# EAGLE board aps (EAGLE 4.13), part 1 of 2
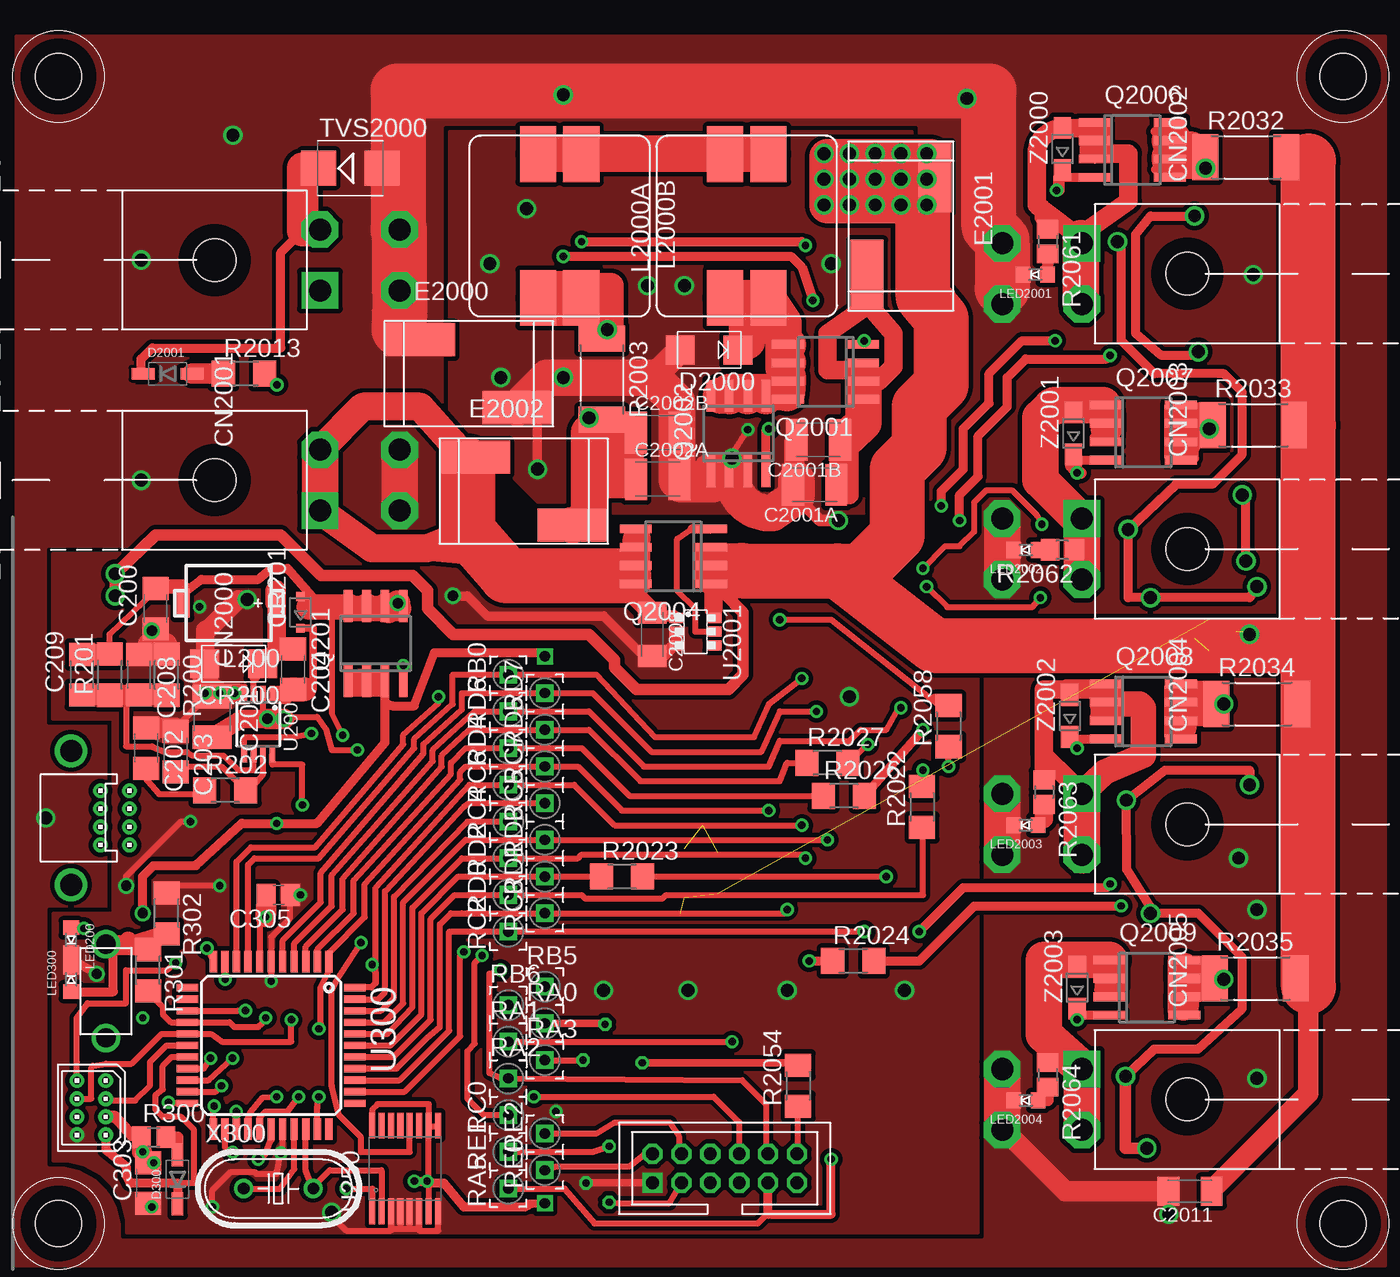
[diagram p0: board, top side]
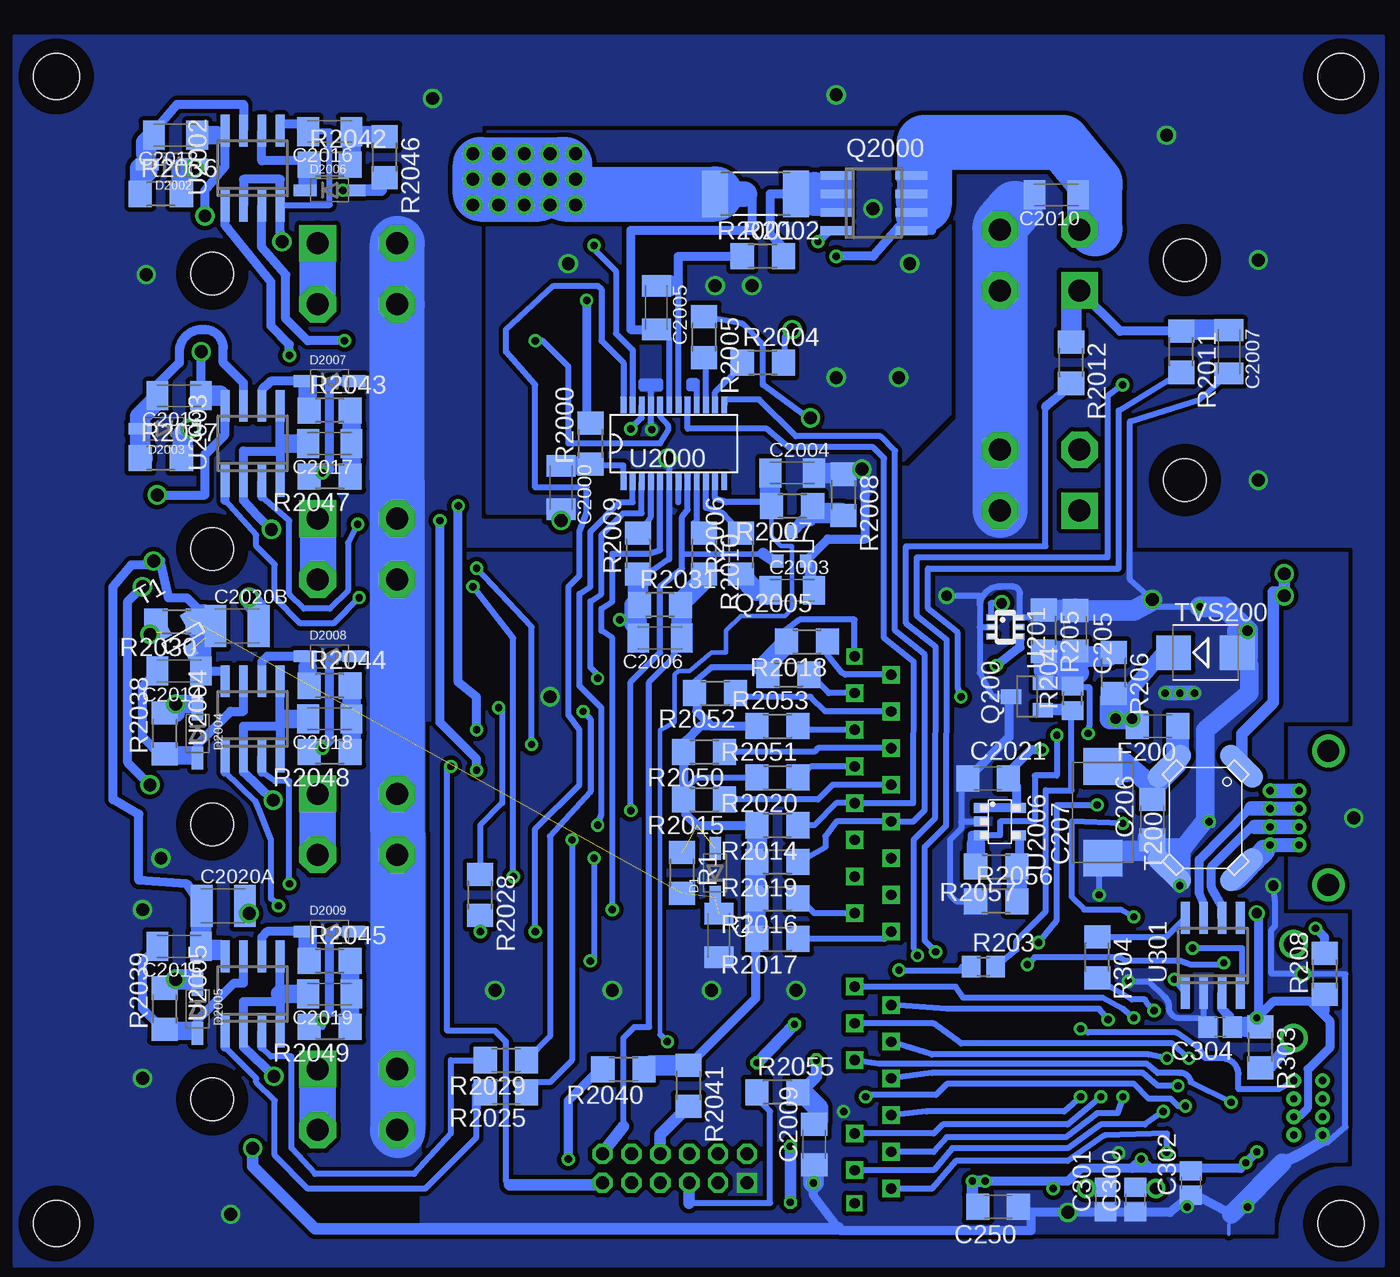
[diagram p1: board, bottom side, seen from below]

No outline drawn. Coordinates in mm, seen from the top.
Copper layers (1*16): Top 0.035mm / dielectric 1.5mm / Bottom 0.035mm
Design rules "LV2": minimum track width 8mil, minimum drill 20mil, track to track 8mil, track to pad 8mil, pad to pad 8mil, via to via 8mil, smd to smd 0mil, copper to edge 40mil, drill to drill 8mil, minimum pad ring 10mil, minimum via ring 8mil, stop-mask expansion 4mil, vias tented up to drill 0mil, thermal gap 10mil
Holes 3.17 mm at 3.17,3.17 92.08,3.17 3.17,82.55 92.08,82.55

## Footprints (pad centres in the part's own frame; a part is rotated, then mirrored left to right if it is on the bottom)
C1206K = smd 1.5 x 2: 1 -1.5,0; 2 1.5,0
C1206 = smd 1.6 x 1.8: 1 -1.4,0; 2 1.4,0
C1210 = smd 1.6 x 2.7: 1 -1.4,0; 2 1.4,0
D/7343-31R = smd 2.55 x 2.7: + 3.175,0; - -3.175,0
C0805 = smd 1.3 x 1.5: 1 -0.85,0; 2 0.85,0
C1210K = smd 1.5 x 2.9: 1 -1.5,0; 2 1.5,0
JST-08R-JED = drill 0.508 pad 1.016 round: 1 1.875,1; 2 1.875,-1; 3 0.625,1; 4 0.625,-1; 5 -0.625,1; 6 -0.625,-1; 7 -1.875,1; 8 -1.875,-1
CAN_NODE = drill 0.508 pad 1.016 round: B+@1 2,1.875; B+@2 0,1.875; B-@7 2,-1.875; B-@8 0,-1.875; CANH@3 2,0.625; CANH@4 0,0.625; CANL@5 2,-0.625; CANL@6 0,-0.625 | drill 1.511 round: CHASSIS@1 -2.032,4.636; CHASSIS@2 -2.032,-4.636
CONN_MINIFIT_HEADER_RT = drill 1.524 pad 2.54 square: 1 2.108,7.29 | drill 1.524 pad 2.54 octagon: 2 -2.108,7.29; 3 2.108,12.802; 4 -2.108,12.802 | hole 2.946: 0,0
2MM-2X6-SHROUDED-HEADER = drill 0.889 pad 1.321 square: 1 -5,-1 | drill 0.889 pad 1.321 octagon: 2 -5,1; 3 -3,-1; 4 -3,1; 5 -1,-1; 6 -1,1; 7 1,-1; 8 1,1; 9 3,-1; 10 3,1; 11 5,1; 12 5,-1
NMINIP2-J1 = smd 2 x 2: A 2,0; C -2,0
SOD323-R = smd 0.6 x 0.6: A 1.1,0; C -1.1,0
SOD-123-DIODE = smd 1.6 x 0.8: 1(CATHODE) -1.7,0; 2(ANODE) 1.7,0
SMB_SHEILD_BEADS = smd 4.826 x 2.286: P$1 -3.365,2.349; P$2 3.365,-2.349
1206 = smd 1.6 x 1.8: 1 -1.4,0; 2 1.4,0
MP2A = smd 1.05 x 2: P1 -3.225,0; P2 3.225,0
INDUCTOR_DRQ125 = smd 3.85 x 2.5: P$1 -4.975,1.5; P$2 -4.975,-1.5; P$3 4.975,-1.5; P$4 4.975,1.5
0603-DIODE = smd 1 x 1.1: A -0.85,0; K 0.85,0
SOT23 = smd 1 x 1.4: 1 -0.95,-1.1; 2 0.95,-1.1; 3 0,1.1
SO8@1 = smd 0.6 x 2.2: 1 -1.905,-2.6; 2 -0.635,-2.6; 3 0.635,-2.6; 4 1.905,-2.6; 5 1.905,2.6; 6 0.635,2.6; 7 -0.635,2.6; 8 -1.905,2.6
SO8 = smd 0.6 x 2.2: 1 -1.905,-2.6; 2 -0.635,-2.6; 3 0.635,-2.6; 4 1.905,-2.6; 5 1.905,2.6; 6 0.635,2.6; 7 -0.635,2.6; 8 -1.905,2.6
SOT-23 = smd 0.787 x 0.889: 1 0.025,-1.016; 2 -0.94,1.016; 3 0.991,1.016
R1206 = smd 1.6 x 1.803: 1 -1.422,0; 2 1.422,0
R0805 = smd 1.3 x 1.5: 1 -0.85,0; 2 0.85,0
R2512 = smd 1.8 x 3.2: 1 -2.8,0; 2 2.8,0
PAD_SQUARE_APC-FREE_0.1/028 = drill 0.711 pad 1.168 square: PAD 0,0
SW_6X3.5MM = drill 1.321 round: 1 -3.25,0; 2 3.25,0
CMS1 = smd 3.63 x 1.5 rotated 45: 1 3.58,-2.5; 3 -3.58,2.5 | smd 3.63 x 1.5 rotated 135: 2 3.58,2.5; 4 -3.58,-2.5
SMB = smd 2.4 x 2.4: A 2.2,0; C -2.2,0
MSOP8 = smd 0.4 x 1.2: 1 -0.975,-2.05; 2 -0.325,-2.05; 3 0.325,-2.05; 4 0.975,-2.05; 5 0.975,2.05; 6 0.325,2.05; 7 -0.325,2.05; 8 -0.975,2.05
SC70-6 = smd 0.4 x 0.75: 1 -0.65,-0.95; 2 0,-0.95; 3 0.65,-0.95; 4 0.65,0.95; 5 0,0.95; 6 -0.65,0.95
TSSOP-16 = smd 0.42 x 1.78: 1 -2.275,-2.97; 2 -1.625,-2.97; 3 -0.975,-2.97; 4 -0.325,-2.97; 5 0.325,-2.97; 6 0.975,-2.97; 7 1.625,-2.97; 8 2.275,-2.97; 9 2.275,2.97; 10 1.625,2.97; 11 0.975,2.97; 12 0.325,2.97; 13 -0.325,2.97; 14 -0.975,2.97; 15 -1.625,2.97; 16 -2.275,2.97
TQFP44 = smd 1.5 x 0.5: 1 -5.8,4; 2 -5.8,3.2; 3 -5.8,2.4; 4 -5.8,1.6; 5 -5.8,0.8; 6 -5.8,0; 7 -5.8,-0.8; 8 -5.8,-1.6; 9 -5.8,-2.4; 10 -5.8,-3.2; 11 -5.8,-4; 23 5.8,-4; 24 5.8,-3.2; 25 5.8,-2.4; 26 5.8,-1.6; 27 5.8,-0.8; 28 5.8,0; 29 5.8,0.8; 30 5.8,1.6; 31 5.8,2.4; 32 5.8,3.2; 33 5.8,4 | smd 0.5 x 1.5: 12 -4,-5.8; 13 -3.2,-5.8; 14 -2.4,-5.8; 15 -1.6,-5.8; 16 -0.8,-5.8; 17 0,-5.8; 18 0.8,-5.8; 19 1.6,-5.8; 20 2.4,-5.8; 21 3.2,-5.8; 22 4,-5.8; 34 4,5.8; 35 3.2,5.8; 36 2.4,5.8; 37 1.6,5.8; 38 0.8,5.8; 39 0,5.8; 40 -0.8,5.8; 41 -1.6,5.8; 42 -2.4,5.8; 43 -3.2,5.8; 44 -4,5.8
SSOP24_NARROW = smd 0.406 x 1.143: 1 -3.556,-2.667; 2 -2.921,-2.667; 3 -2.286,-2.667; 4 -1.651,-2.667; 5 -1.016,-2.667; 6 -0.381,-2.667; 7 0.254,-2.667; 8 0.889,-2.667; 9 1.524,-2.667; 10 2.159,-2.667; 11 2.794,-2.667; 12 3.429,-2.667; 13 3.429,2.667; 14 2.794,2.667; 15 2.159,2.667; 16 1.524,2.667; 17 0.889,2.667; 18 0.254,2.667; 19 -0.381,2.667; 20 -1.016,2.667; 21 -1.651,2.667; 22 -2.286,2.667; 23 -2.921,2.667; 24 -3.556,2.667
SOT23-6 = smd 0.7 x 1: 1 -0.95,-1.3; 2 0,-1.3; 3 0.95,-1.3; 4 0.95,1.3; 5 0,1.3; 6 -0.95,1.3
SOT23-5 = smd 0.7 x 1: 1 -0.95,-1.3; 2 0,-1.3; 3 0.95,-1.3; 4 0.95,1.3; 5 -0.95,1.3
HC49U70 = drill 0.813 round: 1 -2.413,0; 2 2.413,0
SOD323-W = smd 1.5 x 1.2: A 1.45,0; C -1.45,0

## Placement (x,y rotation side)
C1  0.1  [C1206K]  46.23,23.11 270 bottom
C200  22  [C1206]  9.88,45.72 90 top
C201  10  [C1210]  13.82,38.23 270 top
C202  470pF  [C1206]  9.25,36.07 270 top
C203  np  [C1206]  11.28,35.81 270 top
C204  0.1  [C1206]  19.41,41.53 270 top
C205  .1  [C1206]  21.56,44.2 270 bottom
C206  .33  [C1206]  16.23,31.11 90 bottom
C207  22  [D/7343-31R]  19.66,31.62 90 bottom
C208  10pF  [C1206]  8.74,41.15 270 top
C209  120pF  [C1206]  4.8,41.15 90 top
C250  .1  [C1206]  26.9,4.32 180 bottom
C300  27pF  [C0805]  17.4,4.83 90 bottom
C301  27pF  [C0805]  19.46,4.83 90 bottom
C302  .1  [C0805]  13.56,5.97 90 bottom
C303  .1  [C1206]  9.37,5.97 90 top
C304  .1  [C0805]  11.53,16.76 180 bottom
C305  .1  [C0805]  18.39,25.91 180 top
C2000  100nF  [C1206K]  57.15,54.1 270 bottom
C2001A  10uF / 50V  [C1210K]  55.5,54.29 180 top
C2001B  10uF / 50V  [C1210K]  55.75,57.4 180 top
C2002A  10uF  [C1210K]  44.64,54.67 0 top
C2002B  10uF  [C1210K]  44.64,57.91 0 top
C2003  120nF  [C1206K]  41.15,46.99 0 bottom
C2004  4.7nF  [C1206K]  41.15,55.12 0 bottom
C2005  15nF  [C1206K]  50.55,66.55 270 bottom
C2006  1uF  [C1206K]  50.29,43.69 180 bottom
C2007  1uF  [C1206K]  10.92,63.5 270 bottom
C2008  100nF  [C1206K]  44.26,43.94 270 top
C2009  1uF  [C1206]  39.62,8.64 90 bottom
C2010  100nF  [C1206K]  22.86,74.36 180 bottom
C2011  100nF/50V  [C1206K]  81.47,5.4 180 top
C2012  ??  [C1206K]  83.82,78.49 180 bottom
C2013  ??  [C1206K]  83.57,60.45 180 bottom
C2014  ??  [C1206K]  83.57,41.4 180 bottom
C2015  ??  [C1206K]  83.57,22.35 180 bottom
C2016  ??  [C1206K]  73.15,78.74 180 bottom
C2017  ??  [C1206K]  73.15,57.15 180 bottom
C2018  ??  [C1206K]  73.15,38.1 180 bottom
C2019  ??  [C1206K]  73.15,19.05 180 bottom
C2020A  10uF  [C1210K]  80.52,25.15 0 bottom
C2020B  10uF  [C1210K]  79.57,44.51 0 bottom
C2021  100nF  [C1206]  27.6,33.97 0 bottom
CF300  ICD  [JST-08R-JED]  5.44,11.18 270 top
CM200  CAN  [CAN_NODE]  6.07,31.24 0 top
CN2000  BATTERY  [CONN_MINIFIT_HEADER_RT]  13.97,54.61 270 top
CN2001  [CONN_MINIFIT_HEADER_RT]  13.97,69.85 270 top
CN2002  [CONN_MINIFIT_HEADER_RT]  81.28,68.9 90 top
CN2003  [CONN_MINIFIT_HEADER_RT]  81.28,49.85 90 top
CN2004  [CONN_MINIFIT_HEADER_RT]  81.28,30.8 90 top
CN2005  [CONN_MINIFIT_HEADER_RT]  81.28,11.75 90 top
CN2006  [2MM-2X6-SHROUDED-HEADER]  49.28,6.99 0 top
CR200  MA2Q705  [NMINIP2-J1]  15.29,41.91 180 top
CR201  BAV16W  [SOD323-R]  19.91,45.47 90 top
D1  [SOD-123-DIODE]  46.48,27.43 90 bottom
D300  1N4148  [SOD-123-DIODE]  11.4,6.22 90 top
D2000  MA2Q705  [NMINIP2-J1]  48.2,63.63 180 top
D2001  [SOD-123-DIODE]  10.73,61.98 0 top
D2002  [SOD-123-DIODE]  84.07,76.45 180 bottom
D2003  [SOD-123-DIODE]  84.58,58.17 180 bottom
D2004  [SOD-123-DIODE]  82.3,37.08 270 bottom
D2005  [SOD-123-DIODE]  82.3,18.03 270 bottom
D2006  [SOD-123-DIODE]  73.15,74.68 0 bottom
D2007  [SOD-123-DIODE]  73.15,61.47 0 bottom
D2008  [SOD-123-DIODE]  73.15,42.42 0 bottom
D2009  [SOD-123-DIODE]  73.15,23.37 0 bottom
E2000  [SMB_SHEILD_BEADS]  31.56,61.98 0 top
E2001  [SMB_SHEILD_BEADS]  61.47,72.2 270 top
E2002  [SMB_SHEILD_BEADS]  35.37,53.85 0 top
F200  1A  [1206]  15.85,37.59 180 bottom
L200  47uH  [MP2A]  14.96,46.1 180 top
L2000A  6.8uH  [INDUCTOR_DRQ125]  50.8,72.2 270 top
L2000B  6.8uH  [INDUCTOR_DRQ125]  37.85,72.2 90 top
LED200  LED-GRN-  [0603-DIODE]  4.04,22.78 270 top
LED300  LED-RED-0603  [0603-DIODE]  4.04,20.07 90 top
LED2001  LED-RED-0603  [0603-DIODE]  70.76,68.83 180 top
LED2002  LED-RED-0603  [0603-DIODE]  70.1,49.78 180 top
LED2003  LED-RED-0603  [0603-DIODE]  70.1,30.73 180 top
LED2004  LED-RED-0603  [0603-DIODE]  70.1,11.68 180 top
Q200  '3906  [SOT23]  24.89,39.64 90 bottom
Q201  TPC8009  [SO8@1]  25.12,43.31 0 top
Q2000  [SO8]  35.5,73.79 270 bottom
Q2001  [SO8]  56.26,62.1 90 top
Q2002  [SO8]  50.23,57.85 0 top
Q2004  [SO8]  45.72,49.34 90 top
Q2005  [SOT-23]  41.15,50.04 180 bottom
Q2006  [SO8]  77.47,77.47 270 top
Q2007  [SO8]  78.23,57.91 270 top
Q2008  [SO8]  78.23,38.61 270 top
Q2009  [SO8]  78.49,19.49 270 top
R1  ??  [R1206]  48.77,27.43 270 bottom
R200  10k  [R1206]  10.64,41.15 270 top
R201  29.4k  [R1206]  6.71,41.15 90 top
R202  10k  [R1206]  14.71,33.15 0 top
R203  10k  [R0805]  27.91,20.95 0 bottom
R204  100k  [R0805]  21.74,39.51 90 bottom
R205  10.0k  [R1206]  23.72,44.2 270 bottom
R206  60.4k  [R1206]  18.9,41.27 270 bottom
R208  1.8k  [R1206]  4.29,20.45 90 bottom
R300  1k  [R0805]  9.75,9.14 0 top
R301  750  [R1206]  9.37,20.7 270 top
R302  47.5k  [R1206]  10.64,24.64 270 top
R303  1.8k  [R1206]  8.74,15.37 270 bottom
R304  0  [R1206]  20.04,21.59 270 bottom
R2000  10  [R1206]  55.12,57.15 90 bottom
R2001  0.2 / 1W  [R2512]  43.69,74.42 180 bottom
R2002  5k  [R1206]  43.18,70.1 0 bottom
R2003  0.02 / 1W  [R2512]  40.77,61.59 270 top
R2004  2.94k  [R1206]  43.18,62.74 0 bottom
R2005  3.01k  [R1206]  47.24,64.52 270 bottom
R2006  6k  [R1206]  44.7,49.53 90 bottom
R2007  30.1k  [R1206]  41.15,52.83 180 bottom
R2008  51.1k  [R1206]  37.59,53.59 270 bottom
R2009  453k  [R1206]  51.82,49.53 90 bottom
R2010  301.k  [R1206]  47.24,49.53 270 bottom
R2011  10k  [R1206]  14.22,63.5 270 bottom
R2012  10k  [R1206]  21.84,62.74 270 bottom
R2013  220  [R1206]  16,61.98 0 top
R2014  47k  [R1206]  42.16,30.73 180 bottom
R2015  47k  [R1206]  47.24,32.51 180 bottom
R2016  47k  [R1206]  42.16,25.65 180 bottom
R2017  47k  [R1206]  42.16,22.86 180 bottom
R2018  47k  [R1206]  40.13,43.43 180 bottom
R2019  47k  [R1206]  42.16,28.19 180 bottom
R2020  47k  [R1206]  42.16,34.04 180 bottom
R2022  10K  [R1206]  62.93,32 90 top
R2023  10K  [R1206]  42.16,27.18 0 top
R2024  10K  [R1206]  58.17,21.34 0 top
R2025  10K  [R1206]  60.96,12.26 180 bottom
R2026  10K  [R1206]  57.53,32.77 0 top
R2027  10K  [R1206]  56.39,35.05 0 top
R2028  10K  [R1206]  62.74,25.91 270 bottom
R2029  10K  [R1206]  60.96,14.48 180 bottom
R2030  6R2  [R1206]  83.76,44.83 180 bottom
R2031  np  [R1206]  50.29,45.97 0 bottom
R2032  ?? / 1W  [R2512]  85.34,76.96 0 top
R2033  ?? / 1W  [R2512]  85.85,58.42 0 top
R2034  ?? / 1W  [R2512]  86.11,39.12 0 top
R2035  ?? / 1W  [R2512]  85.98,20.13 0 top
R2036  ??  [R1206]  84.84,74.42 0 bottom
R2037  ??  [R1206]  84.84,56.13 0 bottom
R2038  ??  [R1206]  84.58,37.08 90 bottom
R2039  ??  [R1206]  84.58,18.03 90 bottom
R2040  47k  [R1206]  52.83,13.84 180 bottom
R2041  47k  [R1206]  48.32,12.7 270 bottom
R2042  100k  [R1206]  73.15,76.45 0 bottom
R2043  100k  [R1206]  73.15,59.44 0 bottom
R2044  100k  [R1206]  73.15,40.39 0 bottom
R2045  100k  [R1206]  73.15,21.34 0 bottom
R2046  100k  [R1206]  69.34,76.96 270 bottom
R2047  100k  [R1206]  73.15,54.86 180 bottom
R2048  100k  [R1206]  73.15,35.81 180 bottom
R2049  100k  [R1206]  73.15,16.76 180 bottom
R2050  120k  [R1206]  47.24,35.81 180 bottom
R2051  120k  [R1206]  42.16,37.59 180 bottom
R2052  120k  [R1206]  46.48,39.88 180 bottom
R2053  120k  [R1206]  41.4,41.15 180 bottom
R2054  30.1k  [R1206]  54.36,12.7 90 top
R2055  4.7k  [R1206]  42.16,12.26 0 bottom
R2056  249k  [R1206]  27.03,25.46 0 bottom
R2057  681k  [R1206]  27.03,27.88 180 bottom
R2058  np  [R1206]  64.77,37.59 90 top
R2061  5k  [R0805]  71.63,71.12 270 top
R2062  5k  [R0805]  72.64,49.78 180 top
R2063  5k  [R0805]  71.37,33.02 270 top
R2064  5k  [R0805]  71.63,13.46 270 top
RA0  t19  [PAD_SQUARE_APC-FREE_0.1/028]  36.83,17.02 0 top
RA1  t20  [PAD_SQUARE_APC-FREE_0.1/028]  34.29,15.75 0 top
RA2  t21  [PAD_SQUARE_APC-FREE_0.1/028]  34.29,13.21 0 top
RA3  t22  [PAD_SQUARE_APC-FREE_0.1/028]  36.83,14.48 0 top
RA5  t24  [PAD_SQUARE_APC-FREE_0.1/028]  34.29,5.59 90 top
RB0  t8  [PAD_SQUARE_APC-FREE_0.1/028]  34.29,41.15 90 top
RB5  t15  [PAD_SQUARE_APC-FREE_0.1/028]  36.83,19.56 0 top
RB6  t16  [PAD_SQUARE_APC-FREE_0.1/028]  34.29,18.29 0 top
RC0  t32  [PAD_SQUARE_APC-FREE_0.1/028]  34.29,10.67 90 top
RC2  t36  [PAD_SQUARE_APC-FREE_0.1/028]  34.29,23.37 90 top
RC3  t37  [PAD_SQUARE_APC-FREE_0.1/028]  36.83,24.64 90 top
RC4  t42  [PAD_SQUARE_APC-FREE_0.1/028]  34.29,30.99 90 top
RC5  t43  [PAD_SQUARE_APC-FREE_0.1/028]  36.83,32.26 90 top
RC6  t44  [PAD_SQUARE_APC-FREE_0.1/028]  34.29,33.53 90 top
RC7  t1  [PAD_SQUARE_APC-FREE_0.1/028]  36.83,34.8 90 top
RD0  t38  [PAD_SQUARE_APC-FREE_0.1/028]  34.29,25.91 90 top
RD1  t39  [PAD_SQUARE_APC-FREE_0.1/028]  36.83,27.18 90 top
RD2  t40  [PAD_SQUARE_APC-FREE_0.1/028]  34.29,28.45 90 top
RD3  t41  [PAD_SQUARE_APC-FREE_0.1/028]  36.83,29.72 90 top
RD4  t2  [PAD_SQUARE_APC-FREE_0.1/028]  34.29,36.07 90 top
RD5  t3  [PAD_SQUARE_APC-FREE_0.1/028]  36.83,37.34 90 top
RD6  t4  [PAD_SQUARE_APC-FREE_0.1/028]  34.29,38.61 90 top
RD7  t5  [PAD_SQUARE_APC-FREE_0.1/028]  36.83,39.88 90 top
RE0  t25  [PAD_SQUARE_APC-FREE_0.1/028]  36.83,6.86 90 top
RE1  t26  [PAD_SQUARE_APC-FREE_0.1/028]  34.29,8.13 90 top
RE2  t27  [PAD_SQUARE_APC-FREE_0.1/028]  36.83,9.4 90 top
SW300  SW_MOMENTARY-6X3.5MM  [SW_6X3.5MM]  6.45,19.25 90 top
T1  BSS84ZX  [SOT-23]  83.31,43.69 30 bottom
T200  CMS1  [CMS1]  12.55,31.24 90 bottom
TVS200  SMBJ18A  [SMB]  12.55,42.67 0 bottom
TVS2000  [SMB]  23.37,76.2 0 top
U200  LT1767EMS8  [MSOP8]  16.99,37.72 180 top
U201  MAX4841  [SC70-6]  26.39,44.45 270 bottom
U250  HC161  [TSSOP-16]  27.15,6.99 0 top
U300  PIC18F458  [TQFP44]  17.88,15.49 270 top
U301  CANBUS  [SO8]  12.04,21.72 0 bottom
U2000  IC_LTC4007EGN  [SSOP24_NARROW]  49.28,57.15 0 bottom
U2001  IC_LTC4412ES6  [SOT23-6]  47.24,44.13 270 top
U2002  IC_LTC1154CS8  [SO8]  78.49,76.2 0 bottom
U2003  IC_LTC1154CS8  [SO8]  78.49,57.15 0 bottom
U2004  IC_LTC1154CS8  [SO8]  78.49,38.1 0 bottom
U2005  IC_LTC1154CS8  [SO8]  78.49,19.05 0 bottom
U2006  [SOT23-5]  26.77,30.99 270 bottom
X300  10MHz  [HC49U70]  18.39,5.59 0 top
Z2000  15V  [SOD323-W]  72.64,77.53 90 top
Z2001  15V  [SOD323-W]  73.41,57.85 90 top
Z2002  15V  [SOD323-W]  73.15,38.29 90 top
Z2003  15V  [SOD323-W]  73.66,19.49 90 top

## Library data of the parts
C1 C207 C300-C305 C2000 C2001A C2001B C2002A C2002B C2003-C2019 C2020A C2020B R1 R200-R206 R208 R300-R304 R2000-R2020 R2022-R2058 R2061-R2064 = rcl
C200-C206 C208 C209 C250 C2021 = discrete-smd-ipc
CF300 CM200 CN2000-CN2006 D1 D300 D2001-D2009 E2000-E2002 L200 L2000A L2000B LED200 LED300 LED2001-LED2004 Q201 Q2000-Q2002 Q2004 Q2006-Q2009 RA0 RA1-RA3 RA5 RB0 RB5 RB6 RC0 RC2-RC7 RD0 RD1-RD7 RE0 RE1 RE2 SW300 T200 U201 U250 U300 U301 U2000-U2006 Z2000-Z2003 = psas_eagle_library
CR200 D2000 F200 = custom
CR201 TVS200 TVS2000 = diode
Q200 = semicon-smd-ipc
Q2005 T1 = zetex
U200 = custom-linear-technology
X300 = crystal

## Nets
3C4C: U2000.7
4007_BAT: R2005.2 U2000.15
4007_BGATE: Q2002.4 U2000.22
4007_CLP: C2005.1 R2002.1 U2000.18
4007_CSP: R2004.1 U2000.14
4007_DCIN: C2000.1 R2000.1 U2000.1
4007_INFET: Q2000.4 U2000.23
4007_ITH: R2006.2 U2000.10
4007_NTC: R2010.1 U2000.9
4007_RT: R2009.2 U2000.4
4007_TGATE: Q2001.4 U2000.20
B+: CM200.B+@1 CM200.B+@2
B-: CM200.B-@7 CM200.B-@8 T200.4
BATT_TEMP: C2006.1 CN2006.11 R2010.2 R2031.2 R2054.1
BATT_TEMP_GND: CN2006.12 R2058.1
BATTERY+: C2008.1 CN2000.1 CN2000.2 E2002.P$1 Q2004.5 Q2004.6 Q2004.7 Q2004.8 U2001.1
BIN: C206.2 C207.+ F200.1 T200.2
BOOST: C204.2 CR201.C U200.1
CAN_RS: R304.1 U301.8
CANH: CM200.CANH@3 CM200.CANH@4 U301.7
CANL: CM200.CANL@5 CM200.CANL@6 U301.6
CHEM: U2000.16
CHG_GND: C2000.2 C2001A.2 C2001B.2 C2002A.2 C2002B.2 C2003.2 C2004.2 C2006.2 D2000.A E2000.P$2 Q2002.1 Q2002.2 Q2002.3 Q2005.2 R2008.1 R2009.1 R2031.1 R2058.2 U2000.6 U2000.21
CHG_IN: C2001A.1 C2001B.1 E2001.P$2 Q2001.1 Q2001.2 Q2001.3
CHG_OUT: C2002A.1 C2002B.1 E2002.P$2 R2003.2 R2005.1
CHG_SWITCH: D2000.C L2000A.P$3 L2000A.P$4 Q2001.5 Q2001.6 Q2001.7 Q2001.8 Q2002.5 Q2002.6 Q2002.7 Q2002.8
D200_A: D2001.2(ANODE) R2013.1
FB: C208.2 C209.1 R200.2 R201.1 U200.6
GND: C1.2 C200.1 C201.1 C202.1 C203.1 C205.1 C206.1 C207.- C208.1 C250.1 C300.1 C301.1 C302.1 C303.1 C304.2 C305.1 C2007.2 C2008.2 C2009.1 C2016.2 C2017.2 C2018.2 C2019.2 C2020A.2 C2020B.2 C2021.1 CF300.2 CN2006.1 CR200.A LED200.K LED300.K Q200.3 R200.1 R205.1 R302.1 R2056.1 T200.3 TVS200.A U200.4 U201.2 U201.6 U250.3 U250.4 U250.5 U250.6 U250.8 U300.6 U300.29 U301.2 U2001.2 U2001.3 U2002.2 U2002.4 U2002.5 U2003.2 U2003.4 U2003.5 U2004.2 U2004.4 U2004.5 U2005.2 U2005.4 U2005.5 U2006.2
INDUCTOR_OUT: L2000B.P$1 L2000B.P$2 R2003.1 R2004.2
INDUCTORS: L2000A.P$1 L2000A.P$2 L2000B.P$3 L2000B.P$4
ITH_FILTER: C2003.1 R2006.1
LED1_A: LED2001.A R2061.2
LED2_A: LED2002.A R2062.2
LED3_A: LED2003.A R2063.2
LED4_A: LED2004.A R2064.2
LED200_A: LED200.A R208.2
LINEAR_FB: R2056.2 R2057.1 U2006.4
MAIN_GND: C2010.2 C2011.2 CN2000.3 CN2000.4 CN2001.3 CN2001.4 CN2002.3 CN2002.4 CN2003.3 CN2003.4 CN2004.3 CN2004.4 CN2005.3 CN2005.4 E2000.P$1 LED2001.K LED2002.K LED2003.K LED2004.K TVS2000.A
MAIN_PWR: C2005.2 C2011.1 E2001.P$1 Q2004.1 Q2004.2 Q2004.3 R2001.2 R2030.2 R2032.2 R2033.2 R2034.2 R2035.2 T1.2 T200.1 U2000.19 U2001.6
MAIN_PWR_SENSE: Q2000.1 Q2000.2 Q2000.3 R2001.1 R2002.2
PIC_CLKIN: C300.2 U300.30 X300.1
PIC_CLKOUT/10MHZ: C301.2 U250.2 U300.31 X300.2
PIC_LAMP: LED300.A R301.1 R302.2 SW300.2
PIC_MCLR/VPP: CF300.1 D300.1(CATHODE) U300.18
PIC_PWR: C250.2 C302.2 C303.2 C304.1 C305.2 CF300.3 D1.2(ANODE) Q201.1 Q201.2 Q201.3 R1.1 R208.1 R300.1 R303.1 R2014.2 R2015.2 R2016.2 R2017.2 R2018.2 R2019.2 R2020.2 R2040.1 R2041.1 R2050.2 R2051.2 R2052.2 R2053.2 U250.1 U250.7 U250.9 U250.10 U250.16 U300.7 U300.28 U301.3
PIC_RA1/AN1/BAT_CURR: C2004.1 R2007.2 RA1.PAD U300.20 U2000.11
Q201_B: Q200.1 R203.2 R204.1
Q201_GATE: Q201.4 U201.4
Q2004_G: Q2004.4 U2001.5
Q2005_D: Q2005.1 R2007.1 R2008.2
RA0/AN0/BATT_TEMP: R2054.2 RA0.PAD U300.19
RA2/CC_SD\/SPS_OFF\: CN2006.10 R203.1 RA2.PAD U300.21
RA3/AN3/VBAT: C2009.2 R2055.2 RA3.PAD U300.22
RA4/CC_PULSE: CN2006.8 R2041.2 U300.23
RA5/CC_SIGN: CN2006.9 R2040.2 RA5.PAD U300.24
RB0/ACP: R2018.1 RB0.PAD U300.8 U2000.3
RB1/UMB_DET: R2011.2 U300.9
RB2/CANTX: U300.10 U301.1
RB3/CANRX: U300.11 U301.4
RB4/CAN_RS: R304.2 U300.14
RB5/OMNIBUTTON: R301.2 RB5.PAD U300.15
RB6/PGC: CF300.6 RB6.PAD U300.16
RB7/PGD: CF300.5 U300.17
RC0/UMB_CHK: R2012.2 RC0.PAD U300.32
RC1/ROCKETRDY: R2013.2 U300.35
RC2/CHG_SHDN: R2017.1 RC2.PAD U300.36 U2000.24
RC3/FAULT\: R2016.1 RC3.PAD U300.37 U2000.5
RC4/ICL\: R2019.1 RC4.PAD U300.42 U2000.13
RC5/FLAG\: R2014.1 RC5.PAD U300.43 U2000.17
RC6/CHG\: CF300.8 R2015.1 RC6.PAD U300.44 U2000.2
RC7/LOWBAT\: CF300.7 Q2005.3 R2020.1 RC7.PAD U300.1 U2000.8
RD0/S1_CTL: R2022.1 RD0.PAD U300.38
RD1/S2_CTL: R2023.1 RD1.PAD U300.39
RD2/S3_CTL: R2024.1 RD2.PAD U300.40
RD3/S4_CTL: R2025.1 RD3.PAD U300.41
RD4/S1_STAT: R2026.1 R2050.1 RD4.PAD U300.2
RD5/S2_STAT: R2027.1 R2051.1 RD5.PAD U300.3
RD6/S3_STAT: R2028.1 R2052.1 RD6.PAD U300.4
RD7/S4_STAT: R2029.1 R2053.1 RD7.PAD U300.5
RE0/VBAT_EN: CN2006.2 RE0.PAD U300.25
RE1/VBAT_A0: CN2006.3 RE1.PAD U300.26
RE2/VBAT_A1: CN2006.4 RE2.PAD U300.27
SHDN\: C205.2 Q200.2 R204.2 R205.2 R206.1 U200.5
SPS_BUCK_OUT: C200.2 C209.2 CR201.A L200.P2 Q201.5 Q201.6 Q201.7 Q201.8 R201.2 R2057.2 U201.1 U2006.3
SPS_SYNC: U200.8 U250.12
SW1_D: D2002.1(CATHODE) Q2006.5 Q2006.6 Q2006.7 Q2006.8 R2032.1 R2036.2
SW1_DRV: D2006.1(CATHODE) R2042.1 U2002.6
SW1_DS: C2012.2 D2002.2(ANODE) R2036.1 U2002.7
SW1_FILTER: C2016.1 R2042.2 R2046.1
SW1_G: D2006.2(ANODE) Q2006.4 R2046.2 Z2000.C
SW1_IN: R2022.2 U2002.1
SW1_OUT: CN2002.1 CN2002.2 Q2006.1 Q2006.2 Q2006.3 R2061.1 Z2000.A
SW1_STAT: R2026.2 U2002.3
SW2_D: D2003.1(CATHODE) Q2007.5 Q2007.6 Q2007.7 Q2007.8 R2033.1 R2037.2
SW2_DRV: D2007.1(CATHODE) R2043.1 U2003.6
SW2_DS: C2013.2 D2003.2(ANODE) R2037.1 U2003.7
SW2_FILTER: C2017.1 R2043.2 R2047.1
SW2_G: D2007.2(ANODE) Q2007.4 R2047.2 Z2001.C
SW2_IN: R2023.2 U2003.1
SW2_OUT: CN2003.1 CN2003.2 Q2007.1 Q2007.2 Q2007.3 R2062.1 Z2001.A
SW2_STAT: R2027.2 U2003.3
SW3_D: D2004.1(CATHODE) Q2008.5 Q2008.6 Q2008.7 Q2008.8 R2034.1 R2038.2
SW3_DRV: D2008.1(CATHODE) R2044.1 U2004.6
SW3_DS: C2014.2 D2004.2(ANODE) R2038.1 U2004.7
SW3_FILTER: C2018.1 R2044.2 R2048.1
SW3_G: D2008.2(ANODE) Q2008.4 R2048.2 Z2002.C
SW3_IN: R2024.2 U2004.1
SW3_OUT: CN2004.1 CN2004.2 Q2008.1 Q2008.2 Q2008.3 R2063.1 Z2002.A
SW3_STAT: R2028.2 U2004.3
SW4_D: D2005.1(CATHODE) Q2009.5 Q2009.6 Q2009.7 Q2009.8 R2035.1 R2039.2
SW4_DRV: D2009.1(CATHODE) R2045.1 U2005.6
SW4_DS: C2015.2 D2005.2(ANODE) R2039.1 U2005.7
SW4_FILTER: C2019.1 R2045.2 R2049.1
SW4_G: D2009.2(ANODE) Q2009.4 R2049.2 Z2003.C
SW4_IN: R2025.2 U2005.1
SW4_OUT: CN2005.1 CN2005.2 Q2009.1 Q2009.2 Q2009.3 R2064.1 Z2003.A
SW4_STAT: R2029.2 U2005.3
SW_PWR: R303.2 SW300.1
SWITCH_SUPPLY: C2012.1 C2013.1 C2014.1 C2015.1 C2020A.1 C2020B.1 R2030.1 T1.1 U2002.8 U2003.8 U2004.8 U2005.8
SYNC_QD: U250.11
T1_GATE: C1.1 D1.1(CATHODE) R1.2 T1.3
UMB_POS: C2010.1 CN2001.2 D2001.1(CATHODE) Q2000.5 Q2000.6 Q2000.7 Q2000.8 R2000.2 TVS2000.C
UMB_SENSE: C2007.1 CN2001.1 R2011.1 R2012.1
VBAT: CN2006.5 R2055.1
VC: C203.2 R202.2 U200.7
VC_FLT: C202.2 R202.1
VIN: C201.2 C2021.2 F200.2 R206.2 TVS200.C U200.2 U2006.1 U2006.5
VPP_PULLUP: D300.2(ANODE) R300.2
VSW: C204.1 CR200.C L200.P1 U200.3